# EAGLE board PR5009 (EAGLE 6.4)
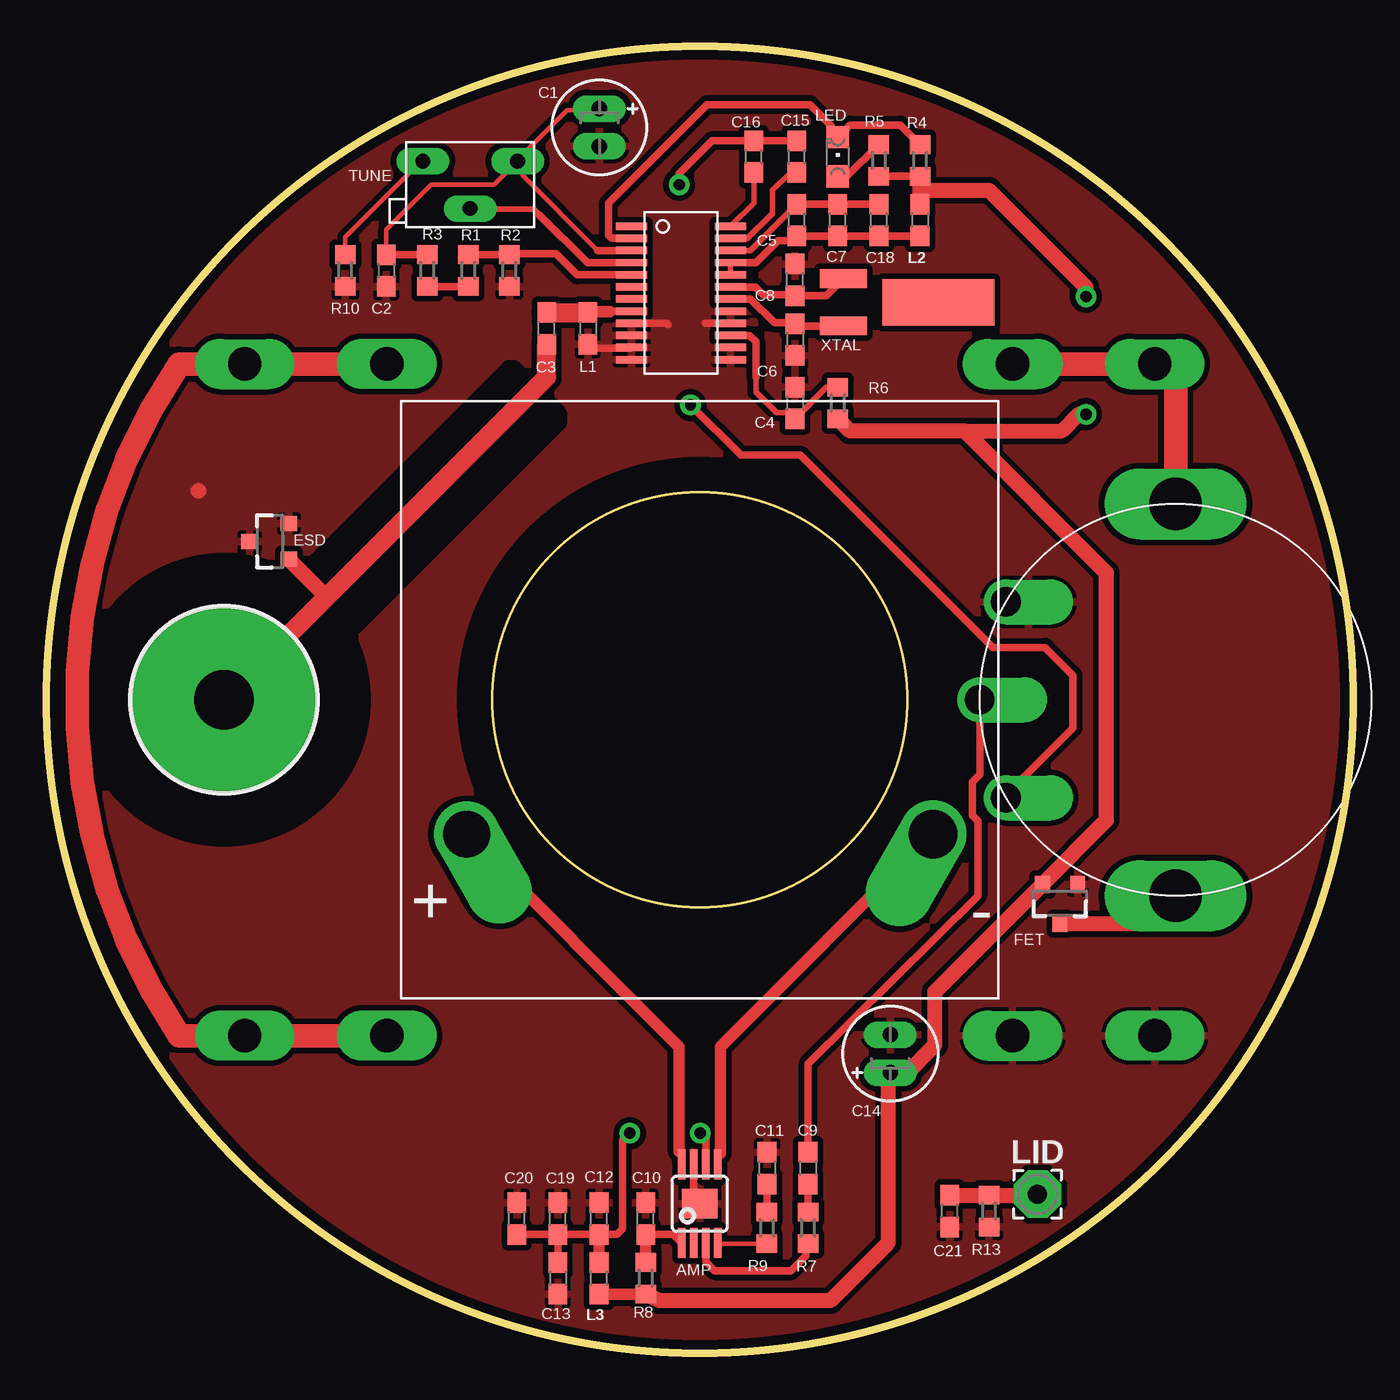
[diagram p0: board, top side]
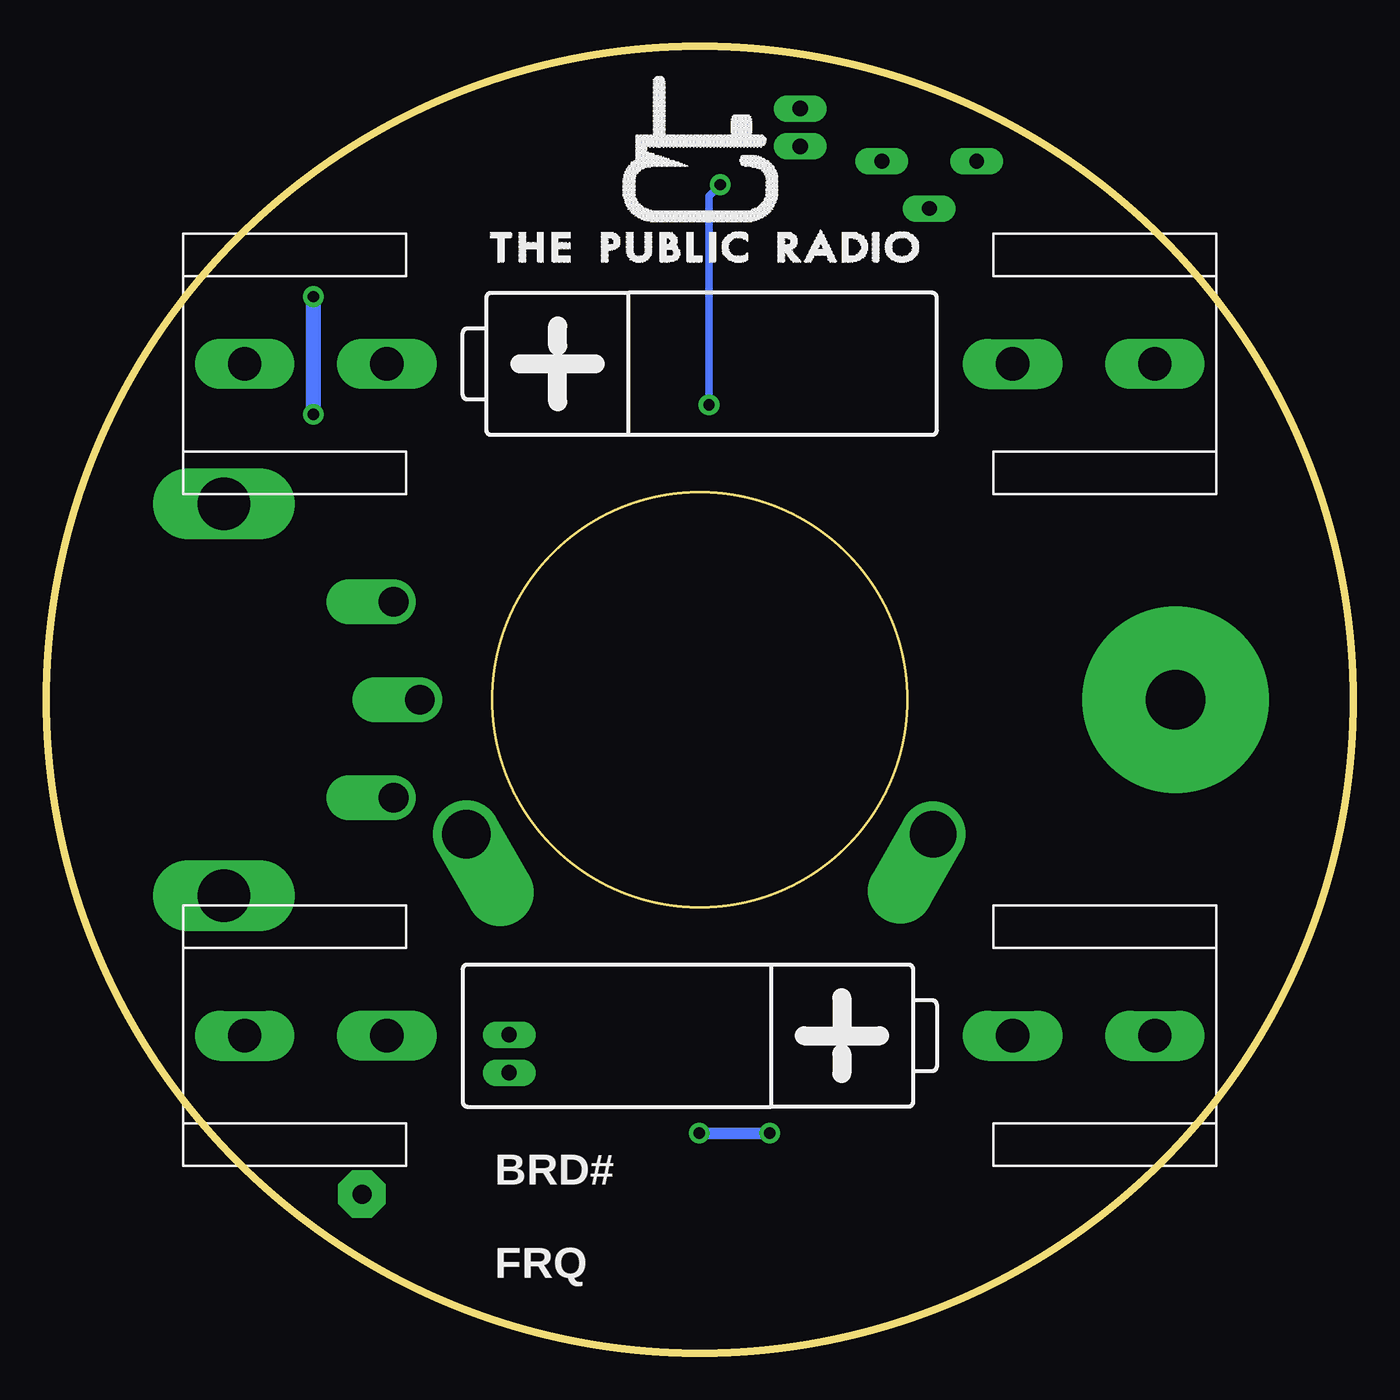
[diagram p1: board, bottom side, seen from below]

Size 70 x 70 mm. Coordinates in mm from the lower left corner, seen from the top.
Outline: circle at 35,35 radius 35
Copper layers (1*16): Top 0.035mm / dielectric 1.5mm / Bottom 0.035mm
Design rules "PCBCart-Standard *": minimum track width 8mil, minimum drill 0.4mm, track to track 8mil, track to pad 8mil, pad to pad 8mil, via to via 8mil, smd to smd 8mil, copper to edge 20mil, drill to drill 8mil, minimum pad ring 8mil, minimum via ring 10mil, stop-mask expansion 3mil, vias tented up to drill 0mil, thermal gap 8mil
tRestrict: area 22.5,22.5 to 47.5,47.5; 8 lines
bRestrict: area 22.5,22.5 to 47.5,47.5

## Footprints (pad centres in the part's own frame; a part is rotated, then mirrored left to right if it is on the bottom)
POWER-SOP8 = smd 0.4 x 1.6: 1 -0.975,-2.1; 2 -0.325,-2.1; 3 0.325,-2.1; 4 0.975,-2.1; 5 0.975,2.1; 6 0.325,2.1; 7 -0.325,2.1; 8 -0.975,2.1 | smd 1.89 x 1.57: 9 0,0
M3_SCREW_POST = drill 3.2 pad 10: P$1 0,0
E2-5 = drill 0.813 pad 1.422 long: + -1.016,0; - 1.016,0
C0603 = smd 1.1 x 1: 1 -0.85,0; 2 0.85,0
SOT23-3 = smd 0.8 x 0.9: 1 -0.95,-1; 2 0.95,-1; 3 0,1.1
SI2333DDS = smd 0.8 x 0.9: 1 -0.95,-1; 2 0.95,-1; 3 0,1.1
0603 = smd 1.1 x 1: 1 -0.85,0; 2 0.85,0
CHIPLED_0805 = smd 1.2 x 1.2: A 0,-1.05; C 0,1.05
2,54/1,0 = drill 1.016 pad 2.54 octagon: 1 0,0
R0603 = smd 1 x 1.1: 1 -0.85,0; 2 0.85,0
64XR_BOURNS_TRIMPOT = drill 0.8 pad 1.422 long: 1 2.54,1.27; 2 0,-1.27; 3 -2.54,1.27
BK-92_MPD_AA_BATT_CLIP = drill 1.778 long: NEG -24.384,0; NEG@2 -16.764,0; POS 16.764,0; POS@2 24.384,0
CE32A_DAYTON_SPKR = drill 2.5 offset: + -12.5,-7.2 | drill 2.6 offset: - 12.5,-7.2
SI4831_FM_IC = smd 1.65 x 0.4: AMI -2.65,-3.575; BAND -2.65,0.975; DBYP 2.65,2.275; FMI -2.65,-0.975; GND 2.65,-2.925; GND@2 2.65,-3.575; LOUT 2.65,3.575; NC -2.65,0.325; NC@2 -2.65,-0.325; NC@3 -2.65,-2.275; NC@4 -2.65,-2.925; RFGND -2.65,-1.625; ROUT 2.65,2.925; RST 2.65,-2.275; STATION -2.65,2.925; STEREO -2.65,3.575; TUNE1 -2.65,2.275; TUNE2 -2.65,1.625; VDD1 2.65,0.975; VDD2 2.65,1.625; VOL+/TREBLE 2.65,-1.625; VOL-/BASS 2.65,-0.975; XTALI 2.65,0.325; XTALO 2.65,-0.325
RV170SF_TAIWANA_POT_SW = drill 1.6 offset: GND -5.25,-9.09; SIGNAL 5.25,-9.09; WIPER 0,-10.5 | drill 2.8 long: SW_IN 10.5,0; SW_OUT -10.5,0
CRYSTAL-32KHZ-SMD = smd 2.5 x 6: SHEILD 0,5.08 | smd 1 x 2.5: X1 -1.27,0; X2 1.27,0

## Placement (x,y rotation side)
AMP  TPA2005D1DGN  [POWER-SOP8]  35,8 0 top
ANT  M3_SCREW_POST  [M3_SCREW_POST]  9.5,35 0 top
C1  47uf  [E2-5]  29.62,65.67 270 top
C2  .1uF  [C0603]  18.2,58 270 top
C3  1nF  [C0603]  26.8,54.9 90 top
C4  .1uf  [C0603]  40.1,50.9 270 top
C5  .1uf  [C0603]  40.2,60.7 90 top
C6  22pF  [C0603]  40.1,54.3 270 top
C7  4.7uf  [C0603]  42.4,60.7 90 top
C8  22pF  [C0603]  40.1,57.5 90 top
C9  .033uf  [C0603]  40.8,9.9 270 top
C10  10uf  [C0603]  32.1,7.2 90 top
C11  .033uf  [C0603]  38.6,9.9 270 top
C12  10uf  [C0603]  29.6,7.2 90 top
C13  1uf  [C0603]  27.4,4 270 top
C14  220uf  [E2-5]  45.22,16.03 90 top
C15  2.2uF  [C0603]  40.2,64.1 90 top
C16  2.2uF  [C0603]  37.9,64.1 90 top
C18  100pf  [C0603]  44.6,60.7 90 top
C19  100nf  [C0603]  27.4,7.2 90 top
C20  100pf  [C0603]  25.2,7.2 90 top
C21  470pF  [C0603]  48.4,7.6 90 top
ESD  CM1213A-01S  [SOT23-3]  11.98,43.49 90 top
FET  SI2333DDS  [SI2333DDS]  54.3,24.1 180 top
L1  56nH  [0603]  29,54.9 270 top
L2  2.5k@100MHz  [0603]  46.8,60.7 270 top
L3  2.5 kOhm @ 100MHz  [0603]  29.6,4 90 top
LED  [CHIPLED_0805]  42.4,64.1 0 top
LID  [2,54/1,0]  53.1,8.5 0 top
R1  412K  [R0603]  22.6,58 270 top
R2  77K  [R0603]  24.8,58 90 top
R3  1K  [R0603]  20.4,58 90 top
R4  10K  [R0603]  46.8,63.9 270 top
R5  220  [R0603]  44.6,63.9 270 top
R6  100K  [R0603]  42.4,50.9 270 top
R7  40.2K  [R0603]  40.8,6.7 270 top
R8  10K  [R0603]  32.1,4 270 top
R9  40.2K  [R0603]  38.6,6.7 270 top
R10  100  [R0603]  16,58 90 top
R13  0Ohm  [R0603]  50.5,7.6 90 top
TUNE  10k  [64XR_BOURNS_TRIMPOT]  22.7,62.6 0 top
U$1  BK-92_MPD_AA_BATT_CLIP  [BK-92_MPD_AA_BATT_CLIP]  35,53 180 bottom
U$2  BK-92_MPD_AA_BATT_CLIP  [BK-92_MPD_AA_BATT_CLIP]  35,17 0 bottom
U$3  CE32A_DAYTON_SPKR  [CE32A_DAYTON_SPKR]  35,35 0 top
U$4  SI4831_FM_IC  [SI4831_FM_IC]  34,56.8 0 top
U$5  RV170SF_TAIWANA_POT_SW  [RV170SF_TAIWANA_POT_SW]  60.5,35 270 top
XTAL  [CRYSTAL-32KHZ-SMD]  42.7,56.3 270 top

## Library data of the parts
AMP = SparkFun-AnalogIC
ANT TUNE U$1-U$5 = PR_Libraries
C1 C14 = CPOL-US-LongPads 
C2-C13 C15 C16 C18-C21 R1-R10 R13 = resistor
ESD FET = PubRadioLib
L1-L3 = SparkFun-Passives
LED = led
LID = wirepad
XTAL = SparkFun-FreqCtrl; PROD_ID: XTAL-07894

## Nets
GND: AMP.7 AMP.9 C1.- C2.2 C4.1 C6.2 C8.2 C10.2 C11.1 C12.2 C13.2 C14.- C19.2 C20.2 C21.1 ESD.2 ESD.3 FET.1 L1.2 R2.1 R10.1 R13.1 U$2.NEG U$2.NEG@2 U$4.AMI U$4.GND U$4.GND@2 U$4.NC@3 U$4.NC@4 U$4.RFGND U$4.VOL+/TREBLE U$4.VOL-/BASS U$5.GND
N$1: AMP.3 R7.2
N$2: AMP.4 R9.2
N$3: C11.2 R9.1
N$4: C9.2 R7.1
N$5: C15.2 C16.2 U$5.SIGNAL
N$6: C5.2 C7.2 C18.2 U$4.DBYP
N$7: C8.1 U$4.XTALI XTAL.X1
N$8: C4.2 R6.1 U$4.RST
N$9: LED.C R4.1 U$4.STATION
N$10: C6.1 U$4.XTALO XTAL.X2
N$11: LED.A R5.1
N$12: TUNE.2 U$4.TUNE2
N$13: R1.1 R2.2 U$4.BAND
N$14: U$1.NEG U$1.NEG@2 U$2.POS U$2.POS@2
N$15: C3.2 L1.1 U$4.FMI
N$16: C5.1 C7.1 C18.1 L2.2 U$4.VDD1 U$4.VDD2
N$17: AMP.6 C12.1 C13.1 C19.1 C20.1 L3.2
N$18: AMP.1 C10.1 R8.1
N$19: ANT.P$1 C3.1 ESD.1
N$20: R1.2 R3.1
N$21: U$1.POS U$1.POS@2 U$5.SW_OUT
N$22: C1.+ C2.1 R3.2 TUNE.1 U$4.TUNE1
N$23: AMP.5 U$3.-
N$24: AMP.8 U$3.+
N$25: C9.1 U$5.WIPER
N$29: R10.2 TUNE.3
N$30: FET.3 U$5.SW_IN
N$31: C15.1 U$4.ROUT
N$32: C21.2 LID.1 R13.2
N$33: C16.1 U$4.LOUT
VCC: C14.+ FET.2 L2.1 L3.1 R4.2 R5.2 R6.2 R8.2

## Tracks (layer width: path | path; a pad name or v marks a point on that pad's centre or on a via)
GND
  Top 0.406: L1.2 29.2,53.85 31.33,53.85 U$4.NC@4 | AMP.7 34.67,8.32 AMP.9 | U$4.VOL+/TREBLE 35.3,55.17 | U$4.RFGND 33.23,55.17 33.3,55.1
  Top 0.813: 8.17,46.2 8.1,46.2
  pour Top (isolate 0.305): 35,70 arc-90 70,35 arc-90 35,0 arc-90 0,35 arc-90
N$1
  Top 0.406: AMP.3 35.33,4.88 35.8,4.4 39.9,4.4 40.7,5.2 40.7,5.75 R7.2
N$2
  Top 0.254: R9.2 36.02,5.85
  Top 0.305: 36.02,5.85 AMP.4
  Top 0.406: 35.98,5.85 AMP.4
N$3
  Top 0.406: R9.1 C11.2
N$4
  Top 0.406: C9.2 R7.1
N$5  (via drill 0.6)
  Top 0.406: v33.9,62.6 33.9,63.2 34.4,63.7 35.65,64.95 C16.2 C15.2 | v34.5,50.8 37.2,48.1 40.4,48.1 50.7,37.8 53.5,37.8 55,36.3 55,33.5 51.41,29.91 U$5.SIGNAL
  Bottom 0.406: v33.9,62.6 34.5,62 v34.5,50.8
N$6
  Top 0.305: 40.15,61.55 C5.2 37.73,59.08 U$4.DBYP
  Top 0.406: C18.2 C7.2 C5.2
N$7
  Top 0.305: 40.05,56.7 C8.1
  Top 0.406: C8.1 41.78,56.65 XTAL.X1 | U$4.XTALI 37.98,57.12 38.4,56.7 40.05,56.7
N$8
  Top 0.305: R6.1 41.8,51.75 C4.2 40.1,50.2 39.9,50.4 39.1,50.4 38,51.5 38,52.5
  Top 0.406: 38,52.3 38,52.5 38,54.2 37.67,54.52 U$4.RST
N$9
  Top 0.305: 42.05,64.8 LED.C
  Top 0.406: U$4.STATION 30.27,59.73 30.1,59.9 30.1,61.6 35.4,66.9 40.9,66.9 42.05,65.75 42.05,64.8 | LED.C 43.05,65.8 45.75,65.8 R4.1
N$10
  Top 0.305: 40.32,55.03 C6.1 40.05,55.2
  Top 0.406: 40.32,55.03 XTAL.X2 | U$4.XTALO 37.73,56.48 39,55.2 40.05,55.2
N$11
  Top 0.305: LED.A 42.9,63.05
  Top 0.406: 42.9,63.05 R5.1
N$12
  Top 0.305: 26.4,61 26.1,61.3 22.73,61.3 TUNE.2
  Top 0.406: U$4.TUNE2 28.98,58.42 26.4,61
N$13
  Top 0.406: R1.1 R2.2 24.85,58.9 27.3,58.9 28.43,57.77 U$4.BAND
N$14
  Top 1.27: U$2.POS U$2.POS@2 7.1,17 arc-68 7.1,53 U$1.NEG U$1.NEG@2
N$15
  Top 0.406: U$4.FMI 30.23,55.83 30.2,55.8
  Top 0.61: 30.2,55.8 29.05,55.8 L1.1
  Top 1.016: C3.2 L1.1
N$16
  Top 0.305: U$4.VDD1 U$4.VDD2 | 39.95,59.6 C5.1
  Top 0.406: L2.2 C18.1 C7.1 C5.1 | U$4.VDD2 38.02,58.42 39.2,59.6 39.95,59.6
N$17  (via drill 0.6)
  Top 0.406: v35.02,11.78 35.33,11.47 AMP.6 | v31.25,11.78 30.87,11.39 30.87,6.66 30.57,6.36 C12.1 C19.1 | C19.1 C20.1 | C19.1 C13.1
  Top 0.61: L3.2 C12.1
  Bottom 0.61: v31.25,11.78 v35.02,11.78
N$18
  Top 0.406: C10.1 33.58,6.35 AMP.1
  Top 0.61: R8.1 C10.1
N$19
  Top 0.813: ESD.1 14.93,40.59 15.09,40.59
  Top 1.016: ANT.P$1 15.09,40.59 26.8,52.3 C3.1
N$20
  Top 0.406: R3.1 R1.2
N$21
  Top 1.27: U$5.SW_OUT 60.5,51.88 U$1.POS@2 U$1.POS
N$22
  Top 0.254: C2.1 18.2,60.2 20.6,62.6 23.97,62.6 TUNE.1 | TUNE.1 25.24,63.94 27.9,66.6 29.53,66.6 C1.+ | 29.54,59.08 29.52,59.08 25.5,63.1 25.5,63.61 TUNE.1
  Top 0.406: U$4.TUNE1 29.54,59.08 | C2.1 R3.2
N$23
  Top 0.406: AMP.5 35.98,10.57 36.1,10.7
  Top 0.61: U$3.- 36.1,16.4 36.1,10.7
N$24
  Top 0.406: AMP.8 34.02,10.68 33.9,10.8
  Top 0.61: 33.9,10.8 33.9,16.4 U$3.+
N$25
  Top 0.406: U$5.WIPER 50,31 49.6,30.6 49.6,28.8 49.9,28.5 49.9,24.5 40.8,15.5 C9.1
N$29
  Top 0.254: TUNE.3 20.07,63.87 16,59.8 R10.2
N$30
  Top 0.813: U$5.SW_IN 59,23 FET.3
N$31
  Top 0.254: C15.1 39.95,63.25 | 36.67,59.7 U$4.ROUT | 37.4,59.7 37.54,59.7
  Top 0.305: 37.4,59.7 36.67,59.7 | C15.1 39.85,63.25 38.9,62.3 38.9,61.2 38.9,61.06 37.54,59.7
N$32
  Top 0.813: C21.2 R13.2 53.1,8.45 LID.1
N$33
  Top 0.305: U$4.LOUT 37.9,61.62 C16.1
VCC  (via drill 0.6)
  Top 0.406: R5.2 R4.2
  Top 0.61: L3.1 R8.2
  Top 0.813: 32.25,3.24 R8.2 32.85,2.8 42,2.8 45.1,5.9 45.1,14.9 C14.+ 46.12,15.02 47.6,16.5 47.6,19.35 FET.2 56.8,28.55 56.8,41.8 49.2,49.4 | L2.1 46.8,62.3 | 46.8,62.3 50.5,62.3 55.7,57.1 v55.7,56.6 | 46.8,62.3 R4.2 | 49.2,49.4 54.4,49.4 55.3,50.3 v55.7,50.3 | R6.2 43.05,49.4 49.2,49.4
  Bottom 0.813: v55.7,50.3 v55.7,56.6

## Text on the board
bPlace: BRD# | FRQ
tNames: TUNE | L1